# Altium PCB PCB.PcbDoc (part 1 of 2)
Units mm, origin at the board's own origin, x right, y up, seen from the top; angles counter-clockwise.
Board outline 168.8 x 66.7 mm, 2 copper layers (Top Layer, Bottom Layer); 76 components, 58 nets, 255 pads, 137 vias.
Unrouted connection lines stored in the file: 16.
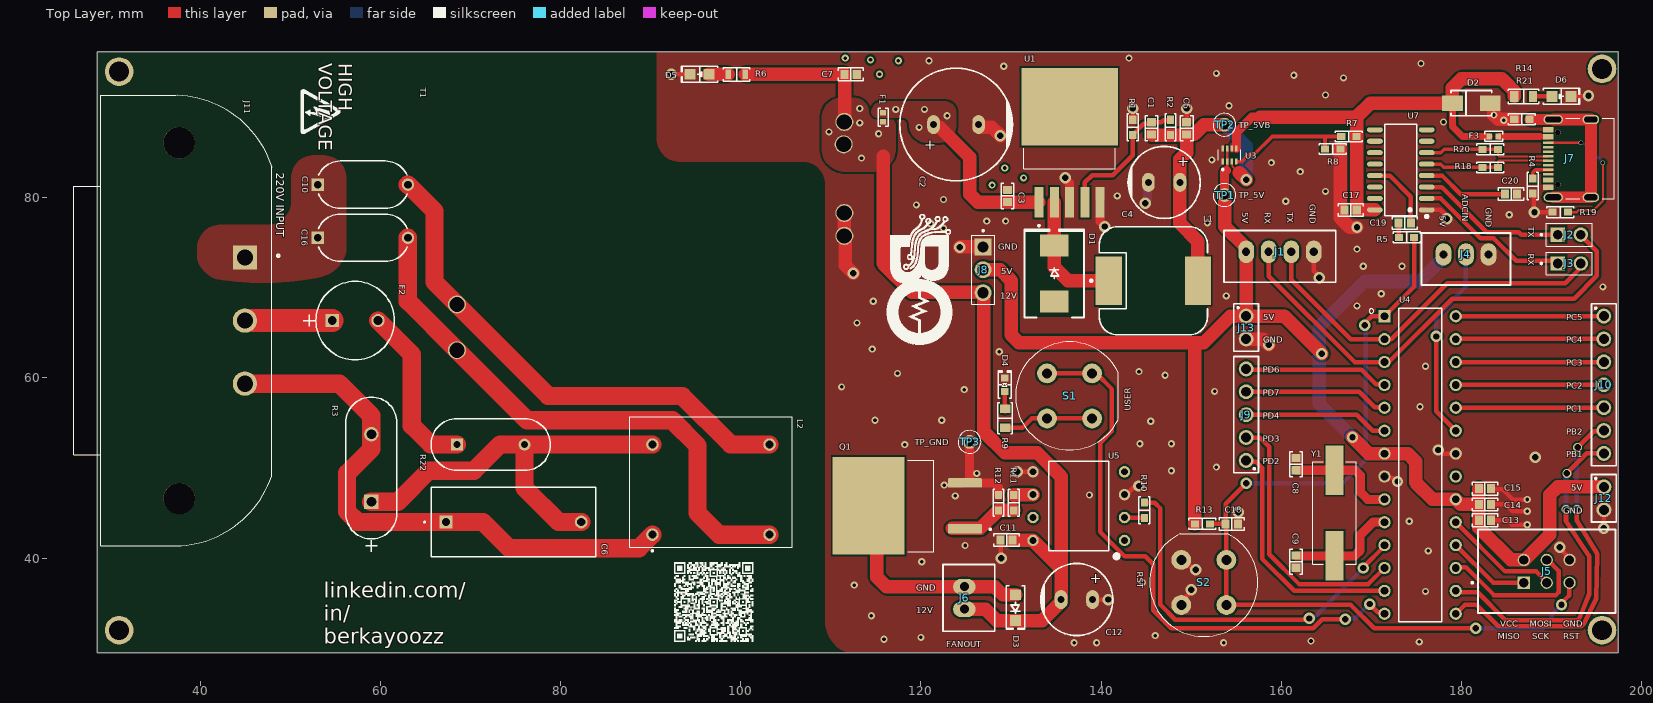
[diagram p0: Top Layer view]
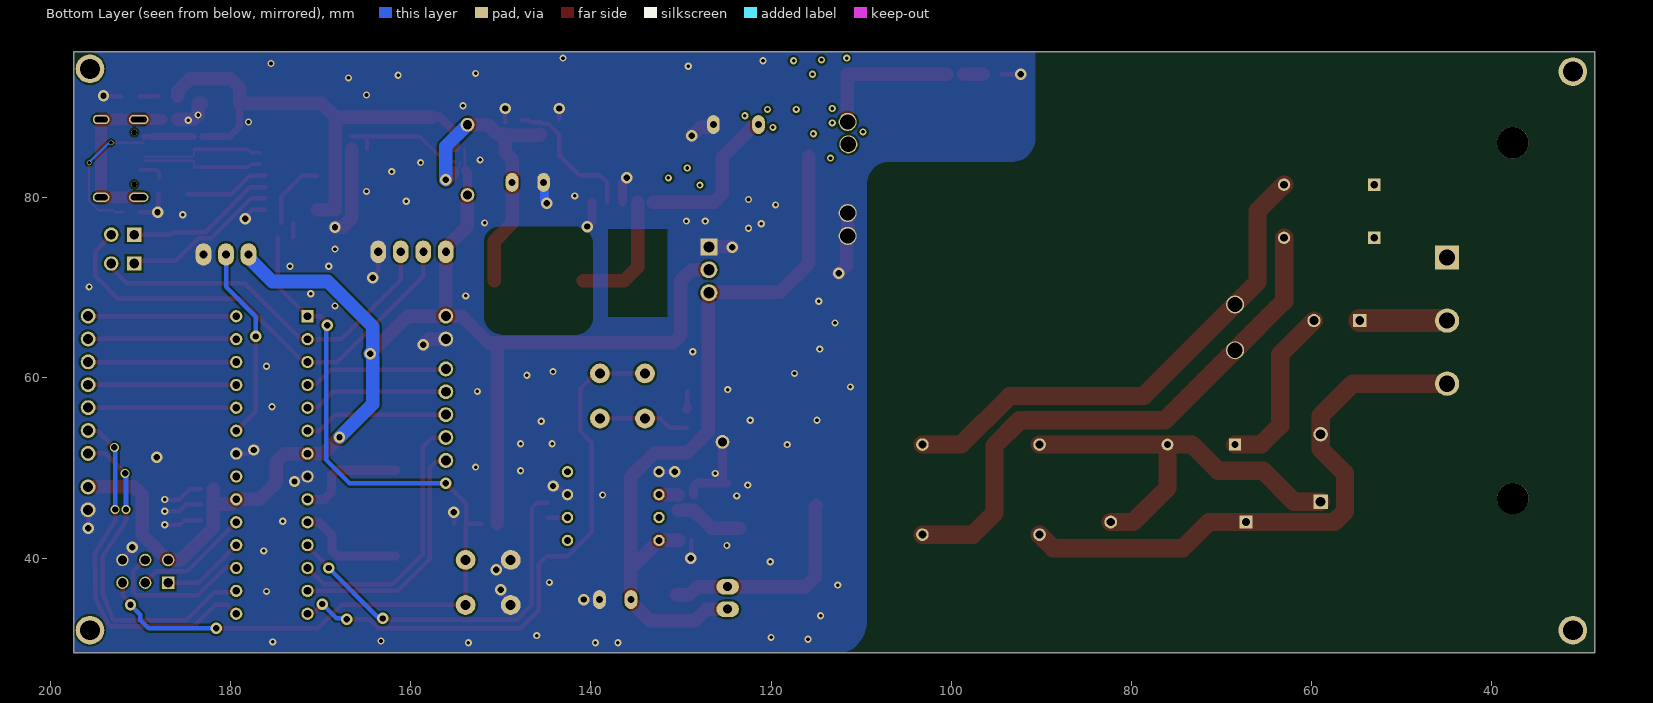
[diagram p1: Bottom Layer view, seen from below]

## Layer stack, top to bottom
Top Solder: solder mask 0.0102, Solder Resist, Dk 3.5
Top Layer: signal copper 0.0356
Dielectric 1: dielectric 0.32, FR-4, Dk 4.8
Bottom Layer: signal copper 0.0356
Bottom Solder: solder mask 0.0102, Solder Resist, Dk 3.5

## Board outline
28.6,29.5 28.6,96.2 197.4,96.2 197.4,29.5

## Design rules (kind name [scope] priority, off if disabled: settings)
Clearance [All] p1: gap=0.229 ignorepadtopadclearanceinfootprint=TRUE except(0.127: Arc-SMDPad Arc-Text Arc-Hole Track-SMDPad Track-Text Track-Hole SMDPad-SMDPad SMDPad-THPad SMDPad-Via SMDPad-Text SMDPad-Hole THPad-THPad THPad-Via THPad-Text THPad-Hole Via-Via Via-Text Via-Hole Fill-Text Poly-Text Region-Text Text-Text Text-Hole; 0.178: SMDPad-Fill SMDPad-Poly SMDPad-Region; 0.2: Arc-Arc Arc-Track Arc-Via Track-Track Track-Via; 0.28: Arc-THPad Track-THPad)
Creepage [All] p1: checkdistance=0.254
DiffPairsRouting [All] p1: maxlimit=0.254 minlimit=0.254 mostfreqgap=0.254 toplayer_minwidth=0.16 toplayer_maxwidth=0.381 toplayer_prefwidth=0.381 bottomlayer_minwidth=0.16 bottomlayer_maxwidth=0.381 bottomlayer_prefwidth=0.381 maxuncoupledlength=12.7
Height [All] p1: minheight=0 maxheight=1500 prefheight=12.7
PasteMaskExpansion [All] p1: expansion=0.127
PolygonConnect [All] p1: connectstyle=Direct reliefconductorwidth=0.254 reliefentries=4 polygonreliefangle="90 Angle" airgapwidth=0.254
RoutingVias [All] p1: holewidth=0.711 width=1.27 viastyle="Through Hole" minholewidth=0.4 minwidth=0.5 maxholewidth=0.711 maxwidth=1.27
SolderMaskExpansion SolderMaskExpansion_1 [All] p1: expansion=0.102 istentingtop=FALSE
SolderMaskExpansion SolderMaskExpansion_Via [IsVia] p2: expansion=0.102 istentingtop=TRUE
Width [All] p1: maxlimit=2.54 minlimit=0.16 preferedwidth=1.5 minimp=50.000000 maximp=50.000000 favimp=50.000000
27 further rules are at their usual default settings.

## Classes and differential pairs
component class "Power Schematic": C1 C2 C3 C4 C5 C6 C7 C10 C16 D1 D5 D6 F1 F2 J8 J11 L1 L2 R1 R2 R3 R6 R7 R8 R14 R22 T1 TP1 TP2 TP3 TP_5V TP_BUCK TP_GND U1 U3
component class "Microcontroller Schematic": C8 C9 C11 C12 C13 C14 C15 C17 C18 C19 C20 D2 D3 D4 F3 J1 J2 J3 J4 J5 J6 J7 J9 J10 J12 J13 Q1 R4 R5 R9 R10 R11 R12 R13 R18 R19 R20 R21 S1 S2 U4 U5 U7 Y1
differential pair D: +D_P -D_N

## Components (designator, comment, footprint, x,y, rotation, side; value= is the part's Value field where it differs from the comment)
C1 "10000 pF" "CAP 0603_1608" 145.6,87.7 r270 top
C2 "470µF" "CAP TH ALUM ELEC D12.50mm S5.00mm H27.00mm" 123.9,88.125 r180 top
C3 "0.1 µF" "CAP 0603_1608" 129.6,80.2 r270 top
C4 "220µF" "CAP TH ALUM ELEC D8.00mm S3.50mm H16.50mm" 147,81.7 r0 top
C5 "0.1 µF" "CAP 0603_1608" 149.5,87.7 r270 top
C6 "R46KI322040M2K" CAP_R46KI322040M2K_KEM 67.3,44 r0 top
C7 "0.1 µF" "CAP 0603_1608" 112.2,93.7 r180 top
C8 "20pF" "CAP 0603_1608" 161.65,50.421 r90 top
C9 "20pF" "CAP 0603_1608" 161.65,39.6 r270 top
C10 "G10E1E222MN0B0S0N0" G10E1E222MN0B0S0N0 58.057,81.45 r0 top
C11 "0.1 µF" "CAP 0603_1608" 129.5,42 r0 top
C12 "100 µF" "CAP TH ALUM ELEC D8.00mm S3.50mm H16.50mm" 137.3,35.4 r0 top
C13 "0.1 µF" "CAP 0603_1608" 182.6,44.2 r180 top
C14 "0.1 µF" "CAP 0603_1608" 182.6,45.95 r180 top
C15 "4.7 µF" "CAP 0603_1608" 182.6,47.7 r180 top
C16 "G10E1E222MN0B0S0N0" G10E1E222MN0B0S0N0 58.057,75.55 r0 top
C17 "0.1 µF" "CAP 0603_1608" 167.7,78.648 r180 top
C18 "0.1 µF" "CAP 0603_1608" 154.5,43.8 r0 top
C19 "0.1 µF" "CAP 0603_1608" 173.7,77.2 r0 top
C20 "0.1 µF" "CAP 0603_1608" 185.5,80.4 r180 top
D1 "MBRS540T3G" "DO214AB SMC" 134.8,71.6 r90 top
D2 "400W, 5VDC" WE-TVSP_DO-214AC_Unidirectional 181.1,90.5 r0 top
D3 "1N4007FLTR" SOD123F 130.5,34.5 r270 top
D4 "Green" "LED 0603_1608 GREEN" 129.3,59.25 r90 top
D5 "Blue" "LED 0805_2012 BLUE" 95.425,93.7 r180 top
D6 "Blue" "LED 0805_2012 BLUE" 191.1,91.25 r0 top
F1 "SF-1206S300-2" "FUSE 0402_1005 0.51MM" 115.8,88.91 r90 top
F2 "MRT 3.15AMMO" MRT_BEL 57.2,66.362 r0 top
F3 "SF-1206S300-2" "FUSE 0402_1005 0.51MM" 183.6,86.8 r180 top
J1 "B4B-XH-A(LF)(SN)" "JST XH B4B-XH-A" 159.85,74 r0 top
J2 "M20-9990246" HARWIN_M20-9990246 191.97,75.9 r0 top
J3 "M20-9990246" HARWIN_M20-9990246 191.97,72.7 r0 top
J4 "B3B-XH-A(LF)(SN)" "JST XH B3B-XH-A" 180.5,73.7 r0 top
J5 "TST-103-01-L-D" SAMTEC_TST-103-01-L-D 186.92,37.26 r0 top
J6 "B2B-XH-A(LF)(SN)" "JST XH B2B-XH-A" 124.818,35.575 r90 top
J7 "10155435-00011LF" AMPHENOL_10155435-00011LF 194.363,84.363 r90 top
J8 "61300311121" WURTH_61300311121 126.9,72 r270 top
J9 "6130XX11121_61300511121" 61300511121 156.1,55.92 r90 top
J10 "6130XX11121_61300711121" 61300711121 195.8,59.24 r270 top
J11 "703W-00/52" QUALTEK_703W-00/52 44.967,73.362 r270 top
J12 "6130XX11121_61300211121" 61300211121 195.81,46.63 r270 top
J13 "6130XX11121_61300211121" 61300211121 156.1,65.59 r270 top
L1 "68 µH" "WURTH WE-PD 1210" 145.8,70.8 r0 top
L2 "SSRH7H-M04596" SSRH7HM04596 90.2,42.6 r0 top value=59.6mH
Q1 "IRFZ44NSTRLPBF" DPAK254P1524X483-3N 118.49,45.8 r180 top
R1 "1 kOhms" "YAGEO RES 0603_1608" 143.5,87.8 r270 top
R2 "3.01 kOhms" "YAGEO RES 0603_1608" 147.7,87.8 r270 top
R3 "14D471K" VARS_B72214S_15p5x5p4-7p5_TDK 59,50 r90 top value=516pF
R4 "5.1 kOhms" "YAGEO RES 0603_1608" 187.9,81.3 r90 top
R5 "0 Ohms" "YAGEO RES 0603_1608" 173.9,75.6 r0 top
R6 "620 Ohms" "YAGEO RES RK73 RS73 SG73 0805_2012" 99.55,93.7 r180 top
R7 "10 kOhms" "YAGEO RES 0603_1608" 167.5,86.8 r0 top
R8 "10 kOhms" "YAGEO RES 0603_1608" 165.7,85.4 r180 top
R9 "220 Ohms" "YAGEO RES 0805_2012" 129.354,55.522 r90 top
R10 "200 Ohms" "YAGEO RES 0603_1608" 144.8,45.3 r270 top
R11 "10 Ohms" "YAGEO RES 0603_1608" 130.3,46.15 r270 top
R12 "10 kOhms" "YAGEO RES 0603_1608" 128.6,46.15 r270 top
R13 "10 kOhms" "YAGEO RES 0603_1608" 151.25,43.8 r180 top
R14 "220 Ohms" "YAGEO RES 0805_2012" 186.9,91.25 r0 top
R18 "10 Ohms" "YAGEO RES 0603_1608" 183.2,83.363 r180 top
R19 "5.1 kOhms" "YAGEO RES 0603_1608" 190.968,78.4 r0 top
R20 "10 Ohms" "YAGEO RES 0603_1608" 183.2,85.363 r180 top
R21 "1 MOhms" "YAGEO RES 0603_1608" 186.7,88.7 r180 top
R22 "MF72-010D11" MF72-010D11_CTM 72.25,52.6 r0 top
S1 "D6R90_F1_LFS" SW_D6R90_F1_LFS 136.5,58 r270 top
S2 "D6R90_F1_LFS" SW_D6R90_F1_LFS 151.4,37.3 r0 top
T1 "AP12N24" "POWER MODULE 49x36mm" 65.5,56.61 r0 top
TP1 "5115" KEYSTONE_5115 153.7,80.3 r0 top
TP2 "5115" KEYSTONE_5115 153.699,88.1 r180 top
TP3 "5115" KEYSTONE_5115 125.4,52.9 r0 top
U1 "LM2596S-ADJ/NOPB" LM2596 136.5,84.805 r90 top
U3 "TPS2116DRLR" SOTFL50P160X60-8N 154.25,84.735 r90 top
U4 "ATMEGA328P-PU" "DIP794W46P254L2967H457Q28B - duplicate" 175.41,50.33 r0 top
U5 "TLP250H(F)" DIP8_TOS 142.6,41.96 r180 top
U7 "CH340C" CH340C 173.2,83.1 r90 top
Y1 "ECS-160-20-5PX-TR" XTAL_ECS-160-20-5PX-TR 165.9,44.996 r90 top

## Footprints (in the part's own frame and the unit in brackets; to place one, negate y for a bottom-side part, rotate by r counter-clockwise, add the part's x,y. Pads: shape width x height; smd on the part's side, far side on the other; paste and mask are expansions set on the pad)
61300211121 [mm]
  round 1.65 hole 1.1: 1(-1.27,0) 2(1.27,0)
  silkscreen extent -2.64,-1.37 2.64,1.37, body extent -2.54,-1.27 2.54,1.27, height 8.55
61300511121 [mm]
  round 1.65 hole 1.1: 1(-5.08,0) 2(-2.54,0) 3(0,0) 4(2.54,0) 5(5.08,0)
  silkscreen extent -6.45,-1.37 6.45,1.37, body extent -6.35,-1.27 6.35,1.27, height 8.55
61300711121 [mm]
  round 1.65 hole 1.1: 1(-7.62,0) 2(-5.08,0) 3(-2.54,0) 4(0,0) 5(2.54,0) 6(5.08,0) 7(7.62,0)
  silkscreen extent -8.99,-1.37 8.99,1.37, body extent -8.89,-1.27 8.89,1.27, height 8.55
AMPHENOL_10155435-00011LF [mm]
  rect 0.6x1.15 smd mask+0.05: A1_B12(-3.2,4.745) A4_B9(-2.4,4.745) B1_A12(3.2,4.745) B4_A9(2.4,4.745)
  rect 0.3x1.15 smd mask+0.05: A5(-1.25,4.745) A6(-0.25,4.745) A7(0.25,4.745) A8(1.25,4.745) B5(1.75,4.745) B6(0.75,4.745) B7(-0.75,4.745) B8(-1.75,4.745)
  oval 1.05x2.15 hole 0.65 slot 1.75 at 90 deg: SH1(-4.32,4.18) SH2(4.32,4.18)
  oval 1.05x1.85 hole 0.65 slot 1.45 at 90 deg: SH3(-4.32,0) SH4(4.32,0)
  round 0.65 hole 0.65 unplated: ""(-2.89,3.68) ""(2.89,3.68)
  silkscreen extent -4.47,-2.6 4.47,2.79, body extent -4.47,-2.6 4.47,5, height 3.26
"CAP 0603_1608" [mm] "Chip Capacitor, 2-Leads, Body 1.60x0.80mm, IPC Medium Density"
  rect 0.9x1 smd: 1(-0.675,0) 2(0.675,0)
  silkscreen extent -1.4,-0.7 1.4,0.7, body extent -0.8,-0.41 0.8,0.41, height 0.82
"CAP TH ALUM ELEC D8.00mm S3.50mm H16.50mm" [mm] "8mm Diameter 3.5mm Lead Spacing Aluminum Electrolytic Capacitors Radial, Can"
  oval 1.4x2.1 hole 0.8: 1(1.75,0) 2(-1.75,0)
  silkscreen extent -4,-4 4,4, body extent -4.01,-4 4,4, height 16.5
"CAP TH ALUM ELEC D12.50mm S5.00mm H27.00mm" [mm] "12.5mm Diameter 5mm Lead Spacing Aluminum Electrolytic Capacitors Radial, Can"
  oval 1.4x2.1 hole 0.8: 1(2.5,0) 2(-2.5,0)
  silkscreen extent -6.25,-6.25 6.25,6.25, body extent -6.26,-6.25 6.25,6.25, height 27
CAP_R46KI322040M2K_KEM [mil]
  rect 56x56 / inner round 60 / far side rect 56x56 hole 36 paste-28 mask+0: 1(0,0)
  round 56 / inner round 60 / far side round 56 hole 36 paste-28 mask+0: 2(590.55,0)
  silkscreen extent -97,-152 655,152, body extent -59,-147 650,147, height 515
CH340C [mm]
  oval 0.56x1.745 smd: 1(-4.452,-2.937) 2(-3.182,-2.937) 3(-1.912,-2.937) 4(-0.642,-2.937) 5(0.628,-2.937) 6(1.898,-2.937) 7(3.168,-2.937) 8(4.438,-2.937) 9(4.438,2.807) 10(3.168,2.807) 11(1.898,2.807) 12(0.628,2.807) 13(-0.642,2.807) 14(-1.912,2.807) 15(-3.182,2.807) 16(-4.452,2.807)
  silkscreen extent -5.33,-3.09 5.07,1.71, body extent -4.95,-3 4.95,3, height 1.75
DIP8_TOS [mil]
  round 50 / inner round 60 / far side round 50 hole 30 paste-25 mask+0: 1(0,0) 2(0,-100) 3(0,-200) 4(0,-300) 5(400,-300) 6(400,-200) 7(400,-100) 8(400,0)
  silkscreen extent 27,-345 331,77, body extent -5,-340 415,40, height 164
"DIP794W46P254L2967H457Q28B - duplicate" [mm]
  rect 1.358x1.358 hole 0.85: 1(-3.96,16.51)
  round 1.358 hole 0.85: 2(-3.96,13.97) 3(-3.96,11.43) 4(-3.96,8.89) 5(-3.96,6.35) 6(-3.96,3.81) 7(-3.96,1.27) 8(-3.96,-1.27) 9(-3.96,-3.81) 10(-3.96,-6.35) 11(-3.96,-8.89) 12(-3.96,-11.43) 13(-3.96,-13.97) 14(-3.96,-16.51) 15(3.96,-16.51) 16(3.96,-13.97) 17(3.96,-11.43) 18(3.96,-8.89) 19(3.96,-6.35) 20(3.96,-3.81) 21(3.96,-1.27) 22(3.96,1.27) 23(3.96,3.81) 24(3.96,6.35) 25(3.96,8.89) 26(3.96,11.43) 27(3.96,13.97) 28(3.96,16.51)
  silkscreen extent -5.65,-17.4 2.38,17.4, body extent -3.95,-17.34 3.95,17.34, height 4.09
"DO214AB SMC" [mm] "Molded Diode, 2-Leads, Body 6.85x5.90mm, IPC Medium Density"
  rect 2.45x3.15 smd: 1(-3.1,0) 2(3.1,0)
  silkscreen extent -4.9,-3.3 4.9,3.3, body extent -3.97,-2.95 3.97,2.95, height 2.6
DPAK254P1524X483-3N [mm]
  rrect25% 3.78x1.06 smd: 1(-6.4,2.54) 3(-6.4,-2.54)
  rect 8x10.84 smd paste-6: 2(4.29,0)
  silkscreen extent -9.3,-5.08 -0.05,5.08, body extent -7.62,-5.08 7.62,5.08, height 4.83
"FUSE 0402_1005 0.51MM" [mm]
  rect 0.6x0.7 smd: 1(-0.5,0) 2(0.5,0)
  silkscreen extent -1,-0.55 1,0.55, body extent -0.5,-0.25 0.5,0.26, height 0.61
G10E1E222MN0B0S0N0 [mil]
  rect 54x54 / inner round 60 / far side rect 54x54 hole 34 paste-27 mask+0: 1(-196.85,0)
  round 54 / inner round 60 / far side round 54 hole 34 paste-27 mask+0: 2(196.85,0)
  silkscreen extent -194,-104 194,104, body extent -210,-97 210,100, height 547
HARWIN_M20-9990246 [mm]
  rect 1.605x1.605 / inner round 1.605 / far side rect 1.605x1.605 hole 1.07: 1(-1.27,0)
  round 1.605 hole 1.07: 2(1.27,0)
  silkscreen extent -3.2,-1.27 2.54,1.27, body extent -2.54,-1.27 2.54,1.27, height 8.74
"JST XH B2B-XH-A" [mm]
  oval 1.75x2.5 hole 1: 1(-1.25,0) 2(1.25,0)
  silkscreen extent -3.7,-3.38 3.7,2.38, body extent -3.7,-3.38 3.7,2.38, height 7
"JST XH B3B-XH-A" [mm]
  oval 1.75x2.5 hole 0.9: 1(-2.5,0) 2(0,0) 3(2.5,0)
  silkscreen extent -4.95,-3.38 4.95,2.38, body extent -4.95,-3.38 4.95,2.38, height 7
"JST XH B4B-XH-A" [mm]
  oval 1.75x2.5 hole 0.9: 1(-3.75,0) 2(-1.25,0) 3(1.25,0) 4(3.75,0)
  silkscreen extent -6.2,-3.38 6.2,2.38, body extent -6.2,-3.38 6.2,2.38, height 7
KEYSTONE_5115 [mm]
  round 1.53 hole 1.02: TP(0,0)
  silkscreen extent -1.27,-1.27 1.27,1.27, body extent -1.33,-1.25 1.21,1.29, height 3.18
"LED 0603_1608 GREEN" [mm] "Chip Diode, 2-Leads, Body 1.60x0.80mm, IPC Medium Density"
  rect 0.8x0.8 smd: 1(-0.75,0) 2(0.75,0)
  silkscreen extent -1.52,-0.7 1.52,0.7, body extent -0.8,-0.4 0.8,0.4, height 0.53
"LED 0805_2012 BLUE" [mm] "Chip Diode, 2-Leads, Body 2.00x1.25mm, IPC Medium Density"
  rect 1.2x1.2 smd: 1(-1.05,0) 2(1.05,0)
  silkscreen extent -2.03,-0.9 2.03,0.9, body extent -1,-0.62 1,0.63, height 0.9
LM2596 [mm]
  rect 3.4x1 smd paste-0.05 mask+0.07: 1(-5.3,3.4) 2(-5.3,1.7) 3(-5.3,0) 4(-5.3,-1.7) 5(-5.3,-3.4)
  rect 8.6x10.7 smd paste-0.05 mask+0.07: 6(5.3,0)
  silkscreen extent -8,-5.08 0.68,5.08, body extent -5.18,-5.08 9.17,5.08, height 4.65
MF72-010D11_CTM [mil]
  rect 52x52 / inner round 60 / far side rect 52x52 hole 32 paste-26 mask+0: 1(-147.64,0)
  round 52 / inner round 60 / far side round 52 hole 32 paste-26 mask+0: 2(147.64,0)
  silkscreen extent -261,-113 261,113, body extent -256,-118 256,118, height 806
MRT_BEL [mil]
  rect 58x58 / inner round 60 / far side rect 58x58 hole 38 paste-29 mask+0: 1(-100,0)
  round 58 / inner round 60 / far side round 58 hole 38 paste-29 mask+0: 2(100,0)
  silkscreen extent -226,-172 172,172, body extent -167,-166 166,166, height 312
"POWER MODULE 49x36mm" [mm]
  round 2 hole 1.7 mask+0.05: 1(3,6.46) 2(3,11.54) 3(46,31.8) 4(45.923,29.315) 5(46,21.69) 6(46,19.15)
  body extent 0,0 49,36, height 22.5
QUALTEK_703W-00/52 [mm]
  rect 2.7x2.7 hole 1.8: 1(0,0)
  round 2.7 hole 1.8: 2(7,0) 3(14,0)
  round 3.5 hole 3.5 unplated: ""(-12.75,-7.3) ""(26.75,-7.3)
  silkscreen extent -18,-19 32,3.85, body extent -17.94,-19.18 32.16,8.62, height 27.12
SAMTEC_TST-103-01-L-D [mm]
  rect 1.37x1.37 hole 1.02: 01(0,0)
  round 1.37 hole 1.02: 02(0,2.54) 03(2.54,0) 04(2.54,2.54) 05(5.08,0) 06(5.08,2.54)
  silkscreen extent -5.83,-3.36 10.16,5.9, body extent -5.1,-3.23 10.14,6.04, height 8.89
SOD123F [mm] "SODFL, 2-Leads, Body 1.60x3.50mm, IPC Medium Density"
  rect 1.2x1.2 smd: 1(-1.43,0) 2(1.43,0)
  silkscreen extent -2.41,-1.02 2.41,1.02, body extent -1.75,-0.8 1.75,0.8, height 1.1
SOTFL50P160X60-8N [mm]
  rrect25% 0.66x0.32 smd: 1(-0.735,0.75) 2(-0.735,0.25) 3(-0.735,-0.25) 4(-0.735,-0.75) 5(0.735,-0.75) 6(0.735,-0.25) 7(0.735,0.25) 8(0.735,0.75)
  silkscreen extent -1.7,-1.23 0.6,1.23, body extent -0.8,-1.05 0.8,1.05, height 0.6
SSRH7HM04596 [mm]
  round 1.4 hole 0.9: 1(0,0) 2(13,0) 3(13,10) 4(0,10)
  silkscreen extent -2.5,-1.9 15.5,13.1, body extent -2.54,-2.3 15.46,12.2, height 10.98
SW_D6R90_F1_LFS [mm]
  round 2.2 hole 1.1: 1(-2.5,2.5) 2(-2.5,-2.5) 3(2.5,-2.5) 4(2.5,2.5)
  silkscreen extent -6,-6 6,5.4, body extent -6,-5.92 6,5.48, height 14.3
VARS_B72214S_15p5x5p4-7p5_TDK [mil]
  rect 63x63 / inner round 60 / far side rect 63x63 hole 43 paste-31.5 mask+0: 1(-147.64,0)
  round 63 / inner round 60 / far side round 63 hole 43 paste-31.5 mask+0: 2(147.64,0)
  silkscreen extent -365,-112 310,112, body extent -322,-182 322,182, height 755
WE-TVSP_DO-214AC_Unidirectional [mm] "Power TVS Diode, 2-Leads. body 4.24x2.67mm"
  rect 2.3x1.7 smd: 1(-2.1,0) 2(2.1,0)
  silkscreen extent -2.25,-1.4 2.25,1.4, body extent -2.56,-1.33 2.56,1.34, height 2.24
"WURTH WE-PD 1210" [mm] "SMT Shielded Power Inductor, 2-leads, body 12x12mm"
  rect 2.9x5.4 smd: 1(-4.95,-0.016) 2(4.95,-0.016)
  silkscreen extent -7.02,-6.02 6,5.98, body extent -6,-6.02 6,5.98, height 9.46
WURTH_61300311121 [mm]
  rect 1.875x1.875 / inner round 1.875 / far side rect 1.875x1.875 hole 1.25: 1(-2.54,0)
  round 1.875 hole 1.25: 2(0,0) 3(2.54,0)
  silkscreen extent -4.45,-1.27 3.81,1.27, body extent -3.81,-1.27 3.81,1.27, height 7.27
XTAL_ECS-160-20-5PX-TR [mm]
  rect 5.5x2 smd: 1(-4.75,0) 2(4.75,0)
  silkscreen extent -5.7,-2.4 5.7,2.4, body extent -6.6,-2.4 6.6,2.4, height 3.2
"YAGEO RES 0603_1608" [mm] "Chip Resistor, 2-Leads, Body 1.60x0.80mm"
  rect 0.9x0.8 smd: 1(-0.85,0) 2(0.85,0)
  silkscreen extent -1.5,-0.6 1.5,0.6, body extent -0.8,-0.4 0.8,0.4, height 0.45
"YAGEO RES 0805_2012" [mm] "Chip Resistor, 2-Leads, Body 2.00x1.25mm"
  rect 0.9x1.2 smd: 1(-1.05,0) 2(1.05,0)
  silkscreen extent -1.7,-0.8 1.7,0.8, body extent -1,-0.62 1,0.63, height 0.6
"YAGEO RES RK73 RS73 SG73 0805_2012" [mm] "Chip Resistor, 2-Leads, Body 2.00x1.25mm"
  rect 0.6x1.05 smd: 1(-0.95,0) 2(0.95,0)
  silkscreen extent -1.48,-0.75 1.48,0.75, body extent -1,-0.62 1,0.63, height 0.6

## Part data
C1: library part KAF15AR71H103KT, "CAP CER 10000PF 50V X7R 0603", Device Package="0603 (1608 Metric)", manufacturer="KYOCERA AVX", Operating Temperature="-55°C ~ 125°C", Ratings=AEC-Q200, Supplier Part Number 1=478-KAF15AR71H103KTCT-ND, Temperature Coefficient=X7R, Tolerance=±10%, Voltage - Rated=50V, Applications="Automotive, Boardflex Sensitive", Capacitance="10000 pF", componentlink1description=Datasheet, componentlink1url=https://datasheets.kyocera-avx.com/AutoMLCC.pdf, componentlink2description="DigiKey Link", componentlink2url=https://www.digikey.com/en/products/detail/kyocera-avx/KAF15AR71H103KT/3660860, Features="Soft Termination", lastupdated="9.02.2024 20:09:12", Lifecycle Status=Active, Minimum Order=1, Mounting Type="Surface Mount, MLCC", Package / Case="0603 (1608 Metric)", packaging=TapeAndReel, Part Number=KAF15AR71H103KT, Part Status=Active, partid=52545, price=0.03, series=FLEXITERM®, Size / Dimension="0.063\" L x 0.032\" W (1.60mm x 0.81mm)", Supplier 1=DigiKey, Thickness (Max)="0.035\" (0.90mm)"
C2: library part EEU-FC1H471B, "CAP ALUM 470UF 20% 50V RADIAL", Device Package="Radial, Can", Lifetime @ Temp.="5000 Hrs @ 105°C", manufacturer="Panasonic Electronic Components", Operating Temperature="-55°C ~ 105°C", Ratings=AEC-Q200, Ripple Current @ High Frequency="1.832A @ 100kHz", Ripple Current @ Low Frequency="1.374A @ 120Hz", Supplier Part Number 1=P19660CT-ND, Tolerance=±20%, Voltage - Rated=50V, Applications=Automotive, Capacitance=470µF, componentlink1description=Datasheet, componentlink1url=http://industrial.panasonic.com/www-cgi/jvcr13pz.cgi?E+PZ+3+ABA0022+EEUFC1H471B+7+WW, componentlink2description="DigiKey Link", componentlink2url=http://digikey.com/product-detail/en/panasonic-electronic-components/EEU-FC1H471B/P19660CT-ND/6109558, Height - Seated (Max)="1.063\" (27.00mm)", lastupdated="2.09.2020 01:32:14", Lead Spacing="0.197\" (5.00mm)", Lifecycle Status=Active, Minimum Order=1, Mounting Type="Through Hole", Package / Case="Radial, Can", packaging=TapeAndBox, Part Number=EEU-FC1H471B, Part Status=Active, partid=15215, Polarization=Polar, price=0.43, series=FC, Size / Dimension="0.492\" Dia (12.50mm)", Supplier 1=DigiKey, Impedance="50 mOhms"
C3 C5 C11 C13 C14 C17 C18 C19 C20: library part C0603X104M3RAC7867, "CAP CER 0.1UF 25V X7R 0603", Device Package="0603 (1608 Metric)", manufacturer=KEMET, Operating Temperature="-55°C ~ 125°C", Supplier Part Number 1=399-13148-1-ND, Temperature Coefficient=X7R, Tolerance=±20%, Voltage - Rated=25V, Applications="Boardflex Sensitive", Capacitance="0.1 µF", componentlink1description=Datasheet, componentlink1url=https://api.kemet.com/component-edge/download/datasheet/C0603X104M3RACTU.pdf, componentlink2description="DigiKey Link", componentlink2url=https://www.digikey.com/en/products/detail/kemet/C0603X104M3RAC7867/2202613, Features="Soft Termination", lastupdated="9.02.2024 20:10:30", Lifecycle Status=Active, Minimum Order=1, Mounting Type="Surface Mount, MLCC", Package / Case="0603 (1608 Metric)", packaging=TapeAndReel, Part Number=C0603X104M3RAC7867, Part Status=Active, partid=2484, price=0.06, series="SMD Comm X7R Flex", Size / Dimension="0.063\" L x 0.031\" W (1.60mm x 0.80mm)", Supplier 1=DigiKey, Thickness (Max)="0.034\" (0.87mm)"
C4: library part EEU-FM1V221L, "CAP ALUM 220UF 20% 35V RADIAL", Device Package="Radial, Can", Lifetime @ Temp.="3000 Hrs @ 105°C", manufacturer="Panasonic Electronic Components", Operating Temperature="-40°C ~ 105°C", Ripple Current @ High Frequency="1.24A @ 100kHz", Ripple Current @ Low Frequency="868mA @ 120Hz", Supplier Part Number 1=P12412-ND, Tolerance=±20%, Voltage - Rated=35V, Applications="General Purpose", Capacitance=220µF, componentlink1description=Datasheet, componentlink1url=http://industrial.panasonic.com/www-cgi/jvcr13pz.cgi?E+PZ+3+ABA0108+EEUFM1V221L+7+WW, componentlink2description="DigiKey Link", componentlink2url=http://digikey.com/product-detail/en/panasonic-electronic-components/EEU-FM1V221L/P12412-ND/613773, Height - Seated (Max)="0.650\" (16.50mm)", lastupdated="8.09.2020 02:47:34", Lead Spacing="0.138\" (3.50mm)", Lifecycle Status=Active, Minimum Order=1, Mounting Type="Through Hole", Package / Case="Radial, Can", packaging=Bulk, Part Number=EEU-FM1V221L, Part Status=Active, partid=24542, Polarization=Polar, price=0.45, series=FM, Size / Dimension="0.315\" Dia (8.00mm)", Supplier 1=DigiKey, Impedance="41 mOhms"
C6: "R46_275, Film, Metallized Polypropylene, Safety, 0.22 uF, 10%, 275 VAC (X2), 560 VDC, 110Ã‚Â°C, Lead Spacing = 15mm", Capacitance=0.2uF, Manufacturer_Name=Kemet, Copyright="Copyright (C) 2025 Ultra Librarian. All rights reserved.", Datasheet=https://content.kemet.com/datasheets/KEM_F3093_R46_X2_275_110C.pdf, Digi-Key_Part_Number_1=399-17016-ND, Manufacturer_Part_Number=R46KI322040M2K, Type="Film Capacitor"
C7: library part C0603C104K5RAC7411, "CAP CER 0.1UF 50V X7R 0603", Device Package="0603 (1608 Metric)", manufacturer=KEMET, Operating Temperature="-55°C ~ 125°C", Supplier Part Number 1=399-C0603C104K5RAC7411CT-ND, Temperature Coefficient=X7R, Tolerance=±10%, Voltage - Rated=50V, Applications="Bypass, Decoupling", Capacitance="0.1 µF", componentlink1description=Datasheet, componentlink1url=https://api.kemet.com/component-edge/download/datasheet/C0603C104K5RAC7411.pdf, componentlink2description="DigiKey Link", componentlink2url=https://www.digikey.com/en/products/detail/kemet/C0603C104K5RAC7411/3317013, lastupdated="9.02.2024 20:10:30", Lifecycle Status=Active, Minimum Order=1, Mounting Type="Surface Mount, MLCC", Package / Case="0603 (1608 Metric)", packaging=TapeAndReel, Part Number=C0603C104K5RAC7411, Part Status=Active, partid=2233, price=0.01, series="SMD Comm X7R", Size / Dimension="0.063\" L x 0.031\" W (1.60mm x 0.80mm)", Supplier 1=DigiKey, Thickness (Max)="0.035\" (0.90mm)"
C8 C9: library part 06033A200JAT2A, "CAP CER 20PF 25V C0G/NP0 0603", Device Package="0603 (1608 Metric)", manufacturer="AVX Corporation", Operating Temperature="-55°C ~ 125°C", Supplier Part Number 1=478-11802-1-ND, Temperature Coefficient="C0G, NP0", Tolerance=±5%, Voltage - Rated=25V, Applications="General Purpose", Capacitance=20pF, componentlink1description=Datasheet, componentlink1url=http://datasheets.avx.com/C0GNP0-Dielectric.pdf, componentlink2description="DigiKey Link", componentlink2url=http://digikey.com/product-detail/en/avx-corporation/06033A200JAT2A/478-11802-1-ND/8573438, lastupdated="2.09.2020 01:03:34", Lifecycle Status=Active, Minimum Order=1, Mounting Type="Surface Mount, MLCC", Package / Case="0603 (1608 Metric)", packaging=TapeAndReel, Part Number=06033A200JAT2A, Part Status=Active, partid=3067, price=0.04, series=-, Size / Dimension="0.063\" L x 0.032\" W (1.60mm x 0.81mm)", Supplier 1=DigiKey, Thickness (Max)="0.035\" (0.90mm)"
C10 C16: "2200 pF ±20% 250V Ceramic Capacitor Y5U (E) Radial, Disc", Capacitance="2200 pF", Ratings="X1, Y2", Tolerance=±20%, Voltage - Rated=250V, componentlink1description=Digikey, componentlink1url=https://www.digikey.com/en/products/detail/songtian-electronic-technology-hk-limited/G10E1E222MN0B0S0N0/13985619
C12: library part EEU-TA1E101, "CAP ALUM 100UF 20% 25V RADIAL", Device Package="Radial, Can", Lifetime @ Temp.="2000 Hrs @ 125°C", manufacturer="Panasonic Electronic Components", Operating Temperature="-40°C ~ 125°C", Ripple Current @ High Frequency="500 mA @ 100 kHz", Ripple Current @ Low Frequency="325 mA @ 120 Hz", Supplier Part Number 1=P19501-ND, Tolerance=±20%, Voltage - Rated="25 V", Applications="General Purpose", Capacitance="100 µF", componentlink1description=Datasheet, componentlink1url=http://industrial.panasonic.com/www-cgi/jvcr13pz.cgi?E+PZ+3+ABA0028+EEUTA1E101+8+WW, componentlink2description="DigiKey Link", componentlink2url=https://www.digikey.com/en/products/detail/panasonic-electronic-components/EEU-TA1E101/2689893, Height - Seated (Max)="0.492\" (12.50mm)", lastupdated="3.06.2024 20:06:12", Lead Spacing="0.138\" (3.50mm)", Lifecycle Status=Active, Minimum Order=1, Mounting Type="Through Hole", Package / Case="Radial, Can", packaging=Bulk, Part Number=EEU-TA1E101, Part Status=Active, partid=7202, Polarization=Polar, price=0.25, series=TA, Size / Dimension="0.315\" Dia (8.00mm)", Supplier 1=DigiKey, Impedance="130 mOhms"
C15: library part CL10A475KA8NQNC, "CAP CER 4.7UF 25V X5R 0603", Device Package="0603 (1608 Metric)", manufacturer="Samsung Electro-Mechanics", Operating Temperature="-55°C ~ 85°C", Supplier Part Number 1=1276-1900-1-ND, Temperature Coefficient=X5R, Tolerance=±10%, Voltage - Rated=25V, Applications="General Purpose", Capacitance="4.7 µF", componentlink1description=Datasheet, componentlink1url=http://www.samsungsem.com/kr/support/product-search/mlcc/CL10A475KA8NQNC.jsp, componentlink2description="DigiKey Link", componentlink2url=https://www.digikey.com/en/products/detail/samsung-electro-mechanics/CL10A475KA8NQNC/3887558, lastupdated="9.02.2024 20:10:30", Lifecycle Status=Active, Minimum Order=1, Mounting Type="Surface Mount, MLCC", Package / Case="0603 (1608 Metric)", packaging=TapeAndReel, Part Number=CL10A475KA8NQNC, Part Status=Active, partid=2349, price=0.06, series=CL, Size / Dimension="0.063\" L x 0.031\" W (1.60mm x 0.80mm)", Supplier 1=DigiKey, Thickness (Max)="0.035\" (0.90mm)"
D1: "DIODE SCHOTTKY 40V 5A SMC", Current - Average Rectified (Io)=5A, Current - Reverse Leakage @ Vr="300µA @ 40V", manufacturer="ON Semiconductor", Operating Temperature - Junction="-65°C ~ 150°C", Package / Case="DO-214AB, SMC", Supplier Device Package=SMC, Supplier Part Number 1=MBRS540T3GOSCT-ND, Voltage - DC Reverse (Vr) (Max)=40V, Voltage - Forward (Vf) (Max) @ If="500mV @ 5A", componentlink1description=Datasheet, componentlink1url=http://www.onsemi.com/pub/Collateral/MBRS540T3-D.PDF, componentlink2description="DigiKey Link", componentlink2url=http://digikey.com/product-detail/en/on-semiconductor/MBRS540T3G/MBRS540T3GOSCT-ND/918011, Diode Type=Schottky, lastupdated="3.06.2024 19:54:13", Lifecycle Status=Active, Minimum Order=1, Mounting Type="Surface Mount", packaging=TapeAndReel, Part Number=MBRS540T3G, Part Status=Active, partid=1713, price=0.17, series=-, Speed="Fast Recovery =< 500ns, > 200mA (Io)", Supplier 1=DigiKey
D2: library part 824500500, "WE-TVSP SMT Power TVS Diode, DO-214AC, Unidirectional, 400W, 5VDC", (Reverse) Breakdown Voltage=6.7V, (Reverse) Peak Pulse Current=43.5A, Case/Size Code=DO-214AC, Clamping Voltage=9.2V, manufacturer="Wurth Elektronik", Operating Temperature Max=150°C, Operating Temperature Min=-65°C, Operating Voltage (DC)=5V, Power Dissipation=400W, Category="Surge Protection", componentlink1description="Website Link", componentlink1url=https://www.we-online.com/redexpert/article/824500500?ad, componentlink2description="Datasheet Link", componentlink2url=https://www.we-online.com/redexpert/spec/824500500?ad, Height=2.25mm, Length=4.24mm, Manufacturer Part Number=824500500, Match Code=WE-TVSP, Mount="Surface Mount", packaging="Tape and Reel", Polarity=Unidirectional, Width=2.67mm
D3: "STANDARD RECTIFIER 1000V SOD-123", Capacitance @ Vr, F="15pF @ 4V, 1MHz", Current - Average Rectified (Io)=1A, Current - Reverse Leakage @ Vr="5µA @ 1000V", manufacturer="SMC Diode Solutions", Package / Case=SOD-123F, Supplier Device Package=SOD-123FL, Supplier Part Number 1=1655-1N4007FLCT-ND, Voltage - DC Reverse (Vr) (Max)=1000V, Voltage - Forward (Vf) (Max) @ If="1.1V @ 1A", componentlink1description=Datasheet, componentlink1url=http://www.smc-diodes.com/propdf/1N4001FL-1N4007FL%20N1646%20REV.A.pdf, componentlink2description="DigiKey Link", componentlink2url=http://digikey.com/product-detail/en/smc-diode-solutions/1N4007FLTR/1655-1N4007FLCT-ND/11657827, Diode Type=Standard, lastupdated="30.08.2020 20:59:55", Lifecycle Status=Active, Minimum Order=1, Mounting Type="Surface Mount", packaging=TapeAndReel, Part Number=1N4007FLTR, partid=3314, price=0.01, Speed="Standard Recovery >500ns, > 200mA (Io)", Supplier 1=DigiKey
D4: library part "LT Q99G.01-R2T1-25-1", "NEXT GENERATION OF CHIP LED 0603", Current - Test=5mA, Device Package="0603 (1608 Metric)", Lens Color=Colorless, manufacturer="ams-OSRAM USA Inc.", Millicandela Rating=247.5mcd, Supplier Device Package=0603, Supplier Part Number 1=475-LTQ99G.01-R2T1-25-1CT-ND, Voltage - Forward (Vf) (Typ)=2.9V, Color=Green, componentlink2description="DigiKey Link", componentlink2url=https://www.digikey.com/en/products/detail/ams-osram-usa-inc/LT-Q99G-01-R2T1-25-1/21556499, Height (Max)=0.75mm, lastupdated="3.06.2024 19:58:39", Lens Size="1.10mm x 0.80mm", Lens Style="Rectangle with Flat Top", Lens Transparency=Clear, Lifecycle Status=Active, Minimum Order=1, Mounting Type="Surface Mount", Package / Case="0603 (1608 Metric)", packaging=TapeAndReel, Part Number="LT Q99G.01-R2T1-25-1", partid=1419, price=0.03, series="Chip LED 0603", Size / Dimension="1.60mm L x 0.80mm W", Supplier 1=DigiKey, Viewing Angle=140°, Wavelength - Dominant=530nm, Wavelength - Peak=518nm
D5 D6: library part APT2012VBC/D, "LED BLUE CLR CHIP SMD", Current - Test=20mA, Device Package="0805 (2012 Metric)", Lens Color=Colorless, manufacturer=Kingbright, Millicandela Rating=180mcd, Supplier Device Package="Chip LED", Supplier Part Number 1=754-1794-1-ND, Voltage - Forward (Vf) (Typ)=3.3V, Color=Blue, componentlink1description=Datasheet, componentlink1url=http://www.kingbrightusa.com/images/catalog/SPEC/APT2012VBC-D.pdf, componentlink2description="DigiKey Link", componentlink2url=https://www.digikey.com/en/products/detail/kingbright/APT2012VBC-D/4098483, Configuration=Standard, Height (Max)=0.75mm, lastupdated="3.06.2024 19:58:02", Lens Size="1.30mm x 1.25mm", Lens Style="Rectangle with Flat Top", Lens Transparency=Clear, Lifecycle Status=Active, Minimum Order=1, Mounting Type="Surface Mount", Package / Case="0805 (2012 Metric)", packaging=TapeAndReel, Part Number=APT2012VBC/D, Part Status=Active, partid=755, price=0.13, series=-, Size / Dimension="2.00mm L x 1.25mm W", Supplier 1=DigiKey, Viewing Angle=120°, Wavelength - Dominant=470nm, Wavelength - Peak=465nm
F1 F3: "FUSE BOARD MOUNT 3A 32VDC 1206", Part Number=SF-1206S300-2
F2: "FUSE", Manufacturer_Name=Belfuse, componentlink1description=Link, componentlink1url=https://www.digikey.com/en/products/detail/bel-fuse-inc/MRT-3-15-AMMO/615070, Copyright="Copyright (C) 2025 Ultra Librarian. All rights reserved.", Digi-Key_Part_Number_1=507-1116-3-ND, Manufacturer_Part_Number="MRT 3.15AMMO"
J1: "CONN HEADER VERT 4POS 2.5MM", Current Rating (Amps)=3A, manufacturer="JST Sales America Inc.", Material Flammability Rating="UL94 V-0", Operating Temperature="-25°C ~ 85°C", Supplier Part Number 1=455-2249-ND, Voltage Rating=250V, Insulation Color=Natural, componentlink1description=Datasheet, componentlink1url=http://www.jst-mfg.com/product/pdf/eng/eXH.pdf, componentlink2description="DigiKey Link", componentlink2url=http://digikey.com/product-detail/en/jst-sales-america-inc/B4B-XH-A-LF-SN/455-2249-ND/1651047, Connector Type=Header, Contact Finish - Mating=Tin, Contact Finish - Post=Tin, Contact Length - Post="0.134\" (3.40mm)", Contact Material=Brass, Contact Shape=Square, Contact Type="Male Pin", Fastening Type="Detent Lock", lastupdated="12.01.2020 23:46:34", Lifecycle Status=Active, Minimum Order=1, Mounting Type="Through Hole", Number of Positions=4, Number of Positions Loaded=All, Number of Rows=1, packaging=Bulk, Part Number=B4B-XH-A(LF)(SN), Part Status=Active, partid=69, Pitch - Mating="0.098\" (2.50mm)", price=0.21, series=XH, Shrouding="Shrouded - 4 Wall", Style="Board to Cable/Wire", Supplier 1=DigiKey, Termination="Press-Fit, Solder", Insulation Height="0.276\" (7.00mm)", Insulation Material="Polyamide (PA66), Nylon 6/6"
J2 J3: "2.54mm (0.1) Pitch SIL Vertical Throughboard Pin Header, 6.1mm mating pin height, tin, 2 contacts", Package=None, Check_prices=https://www.snapeda.com/parts/M20-9990246/Harwin/view-part/?ref=eda, MF=Harwin, MP=M20-9990246, SnapEDA_Link=https://www.snapeda.com/parts/M20-9990246/Harwin/view-part/?ref=snap
J4: "CONN HEADER VERT 3POS 2.5MM", Current Rating (Amps)=3A, manufacturer="JST Sales America Inc.", Material Flammability Rating="UL94 V-0", Operating Temperature="-25°C ~ 85°C", Supplier Part Number 1=455-2248-ND, Voltage Rating=250V, Insulation Color=Natural, componentlink1description=Datasheet, componentlink1url=http://www.jst-mfg.com/product/pdf/eng/eXH.pdf, componentlink2description="DigiKey Link", componentlink2url=http://digikey.com/product-detail/en/jst-sales-america-inc/B3B-XH-A-LF-SN/455-2248-ND/1651046, Connector Type=Header, Contact Finish - Mating=Tin, Contact Finish - Post=Tin, Contact Length - Post="0.134\" (3.40mm)", Contact Material=Brass, Contact Shape=Square, Contact Type="Male Pin", Fastening Type="Detent Lock", lastupdated="12.01.2020 23:46:22", Lifecycle Status=Active, Minimum Order=1, Mounting Type="Through Hole", Number of Positions=3, Number of Positions Loaded=All, Number of Rows=1, packaging=Bulk, Part Number=B3B-XH-A(LF)(SN), Part Status=Active, partid=68, Pitch - Mating="0.098\" (2.50mm)", price=0.19, series=XH, Shrouding="Shrouded - 4 Wall", Style="Board to Cable/Wire", Supplier 1=DigiKey, Termination="Press-Fit, Solder", Insulation Height="0.276\" (7.00mm)", Insulation Material="Polyamide (PA66), Nylon 6/6"
J5: "Connector Header Through Hole 6 position 0.100 _2.54mm_", Package=None, Availability=Unavailable, MF=Samtec, MP=TST-103-01-L-D, price=None, SnapEDA_Link=https://www.snapeda.com/parts/TST-103-01-L-D/Samtec/view-part/3264916/?ref=snap, Toby_UK-Purchase-URL=https://snapeda.com/shop?store=Toby+UK&id=3264916
J6: "CONN HEADER VERT 2POS 2.5MM", Current Rating (Amps)=3A, manufacturer="JST Sales America Inc.", Material Flammability Rating="UL94 V-0", Operating Temperature="-25°C ~ 85°C", Supplier Part Number 1=455-2247-ND, Voltage Rating=250V, Insulation Color=Natural, componentlink1description=Datasheet, componentlink1url=http://www.jst-mfg.com/product/pdf/eng/eXH.pdf, componentlink2description="DigiKey Link", componentlink2url=http://digikey.com/product-detail/en/jst-sales-america-inc/B2B-XH-A-LF-SN/455-2247-ND/1651045, Connector Type=Header, Contact Finish - Mating=Tin, Contact Finish - Post=Tin, Contact Length - Post="0.134\" (3.40mm)", Contact Material=Brass, Contact Shape=Square, Contact Type="Male Pin", Fastening Type="Detent Lock", lastupdated="12.01.2020 23:46:08", Lifecycle Status=Active, Minimum Order=1, Mounting Type="Through Hole", Number of Positions=2, Number of Positions Loaded=All, Number of Rows=1, packaging=Bulk, Part Number=B2B-XH-A(LF)(SN), Part Status=Active, partid=67, Pitch - Mating="0.098\" (2.50mm)", price=0.15, series=XH, Shrouding="Shrouded - 4 Wall", Style="Board to Cable/Wire", Supplier 1=DigiKey, Termination="Press-Fit, Solder", Insulation Height="0.276\" (7.00mm)", Insulation Material="Polyamide (PA66), Nylon 6/6"
J7: "USB-C (USB TYPE-C) Receptacle Connector 24 (16+8 Dummy) Position Surface Mount, Right Angle", manufacturer="AMPHENOL ICC (FCI)", Package=None, Supplier Part Number 1=04AJ5525, Availability=Unavailable, Manufacturer Part Number=10155435-00011LF, MP=10155435-00011LF, price=None, RoHS=No, Supplier 1=Newark
J8 J9 J10 J12 J13: Package=None, Availability=Unavailable, price=None
  J8: MP=61300311121
  J9: MF="{'manufacturer': u'W\xfcrth Elektronik'}", MP=61300511121
  J10: MF="{'manufacturer': u'Wurth Electronics'}", MP=61300711121
  J12 J13: MF="{'manufacturer': u'Wurth Electronics'}", MP=61300211121
J11: "Mains Power Connector, 15A, 250VAC, Female, Solder Terminal, Receptacle", Color=Black, Current=15A, manufacturer=Qualtek, Max Voltage Rating (AC)=250V, Package=None, Supplier Part Number 1=562-703W-00/52, Approvals="CSA, DEMKO, FIMKO, KEMA, NEMKO, SEMKO, UL, VDE", Availability=Unavailable, Category="Power Connectors", componentlink1description=https://datasheet.octopart.com:443/703W-00/52-Qualtek-datasheet-12512752.pdf?src-supplier=IHS, componentlink1url=https://datasheet.octopart.com:443/703W-00/52-Qualtek-datasheet-12512752.pdf?src-supplier=IHS, componentlink2description=https://datasheet.octopart.com:443/703W-00/52-Qualtek-datasheet-156925.pdf?src-supplier=Sager+Electronics, componentlink2url=https://datasheet.octopart.com:443/703W-00/52-Qualtek-datasheet-156925.pdf?src-supplier=Sager+Electronics, ComponentLink3Description=https://datasheet.octopart.com:443/703W-00/52-Qualtek-datasheet-45059.pdf?src-supplier=RS+(Formerly+Allied+Electronics), ComponentLink3URL=https://datasheet.octopart.com:443/703W-00/52-Qualtek-datasheet-45059.pdf?src-supplier=RS+(Formerly+Allied+Electronics), ComponentLink4Description=https://datasheet.octopart.com:443/703W-00/52-Qualtek-datasheet-138486.pdf?src-supplier=DigiKey, ComponentLink4URL=https://datasheet.octopart.com:443/703W-00/52-Qualtek-datasheet-138486.pdf?src-supplier=DigiKey, Connector Type="Pin, Receptacle", Contact Gender=Female, Contact Material=Tin, Contact Plating=Tin, Current Rating=15A, Fuse=No, Gender=Receptacle, Height=27.8mm, Housing Material=Thermoplastic, Lead Free="Lead Free", Lifecycle Status=Production, Manufacturer Part Number=703W-00/52, Max Current Rating=15A, MF=Qualtek, Mounting Technology="Flanges, PCB, Panel, Through Hole", MP=703W-00/52, Number of Contacts=3, Number of Poles=2, Number of Positions=3, Orientation="Right Angle", Panel Thickness=3.048mm, Pins=3, Pitch=7mm, price=None, Pricing 1="1=1,54, 10=1,31, 50=1,17, 100=1,08, 1000=0,926, 10000=0,882 (USD)", REACH SVHC=Yes, RoHS=Compliant, Schedule B="8536695050, 8536695050|8536695050|8536695050|8536695050|8536695050", SnapEDA_Link=https://www.snapeda.com/parts/703W-00/52/Qualtek/view-part/46399/?ref=snap, Stock 1=1479, Supplier 1=Mouser, Termination=Solder, Voltage Rating=250V, Voltage Rating (AC)=250V, Voltage Rating (DC)=250V
L1: library part 7447709680, "FIXED IND 68UH 3.2A 89 MOHM SMD", Current - Saturation=3.6A, Current Rating (Amps)="3.2 A", DC Resistance (DCR)="89mOhm Max", Device Package=Nonstandard, Frequency - Self Resonant=5.5MHz, manufacturer="Würth Elektronik", Operating Temperature="-40°C ~ 125°C", Ratings=AEC-Q200, Supplier Device Package=1212, Supplier Part Number 1=732-1247-1-ND, Tolerance=±20%, Inductance Frequency - Test="1 kHz", componentlink1description=Datasheet, componentlink1url=https://katalog.we-online.de/pbs/datasheet/7447709680.pdf, componentlink2description="DigiKey Link", componentlink2url=https://www.digikey.com/en/products/detail/würth-elektronik/7447709680/1638652, Height - Seated (Max)="0.394\" (10.00mm)", lastupdated="3.06.2024 20:26:17", Lifecycle Status=Active, Material - Core=Ferrite, Minimum Order=1, Mounting Type="Surface Mount", Package / Case=Nonstandard, packaging=TapeAndReel, Part Number=7447709680, Part Status=Active, partid=5691, price=1.48, series=WE-PD, Shielding=Shielded, Size / Dimension="0.472\" L x 0.472\" W (12.00mm x 12.00mm)", Supplier 1=DigiKey, Type="Drum Core, Wirewound", Inductance="68 µH"
L2: "Common Mode Chokes Dual 59600uH 10kHz 0.4A 2.02Ohm DCR Thru-Hole Tray", Current Rating=400mA, manufacturer=KEMET, Max Operating Temperature=120°C, Min Operating Temperature=-25°C, Mouser Part Number=80-SSRH7H-M04596, Voltage Rating=250V, Insulation Resistance=100MΩ, Approvals=UL, Category="Common Mode Chokes", componentlink1description=https://datasheet.octopart.com:443/SSRH7H-M04596-KEMET-datasheet-180505042.pdf?src-supplier=TME, componentlink1url=https://datasheet.octopart.com:443/SSRH7H-M04596-KEMET-datasheet-180505042.pdf?src-supplier=TME, componentlink2description=https://datasheet.octopart.com:443/SSRH7H-M04596-KEMET-datasheet-181844466.pdf?src-supplier=TME, componentlink2url=https://datasheet.octopart.com:443/SSRH7H-M04596-KEMET-datasheet-181844466.pdf?src-supplier=TME, ComponentLink3Description=https://datasheet.octopart.com:443/SSRH7H-M04596-KEMET-datasheet-119327233.pdf?src-supplier=TME, ComponentLink3URL=https://datasheet.octopart.com:443/SSRH7H-M04596-KEMET-datasheet-119327233.pdf?src-supplier=TME, ComponentLink4Description=https://datasheet.octopart.com:443/SSRH7H-M04596-KEMET-datasheet-118607337.pdf?src-supplier=TME, ComponentLink4URL=https://datasheet.octopart.com:443/SSRH7H-M04596-KEMET-datasheet-118607337.pdf?src-supplier=TME, ComponentLink5Description=https://datasheet.octopart.com:443/SSRH7H-M04596-KEMET-datasheet-141259685.pdf?src-supplier=Newark, ComponentLink5URL=https://datasheet.octopart.com:443/SSRH7H-M04596-KEMET-datasheet-141259685.pdf?src-supplier=Newark, ComponentLink6Description=https://datasheet.octopart.com:443/SSRH7H-M04596-KEMET-datasheet-182797630.pdf?src-supplier=Master+Electronics, ComponentLink6URL=https://datasheet.octopart.com:443/SSRH7H-M04596-KEMET-datasheet-182797630.pdf?src-supplier=Master+Electronics, Datasheet Link=https://content.kemet.com/datasheets/KEM_LF0040_SSRH7H-M.pdf, Geometry.Height=12mm, Height=12mm, Length=18mm, Lifecycle Status=Production, Manufacturer Part Number=SSRH7H-M04596, Manufacturer_Name=KEMET, Manufacturer_Part_Number=SSRH7H-M04596, Mouser Price/Stock=https://www.mouser.co.uk/ProductDetail/KEMET/SSRH7H-M04596?qs=r5DSvlrkXmJdXW%2FbuXmveA%3D%3D, Pricing 1="100=0,6846, 300=0,678, 500=0,677, 1000=0,664, 5000=0,655 (USD)", REACH SVHC=Yes, RoHS=Compliant, Stock 1=22200, Supplier 1="Arrow Electronics", Supplier Part Number 1=SSRH7H-M04596, Width=14.5mm
Q1: "RoHS Compliant", Package="D2PAK Infineon", Check_prices=https://www.snapeda.com/parts/IRFZ44NSTRLPBF/Infineon+Technologies/view-part/?ref=eda, MF="Infineon Technologies", MP=IRFZ44NSTRLPBF, SnapEDA_Link=https://www.snapeda.com/parts/IRFZ44NSTRLPBF/Infineon+Technologies/view-part/?ref=snap
R1: library part RT0603BRD071KL, "RES SMD 1K OHM 0.1% 1/10W 0603", Device Package="0603 (1608 Metric)", manufacturer=Yageo, Operating Temperature="-55°C ~ 155°C", Power (Watts)="0.1W, 1/10W", Supplier Device Package=0603, Supplier Part Number 1=YAG1237CT-ND, Temperature Coefficient=±25ppm/°C, Tolerance=±0.1%, componentlink1description=Datasheet, componentlink1url=https://www.yageo.com/upload/media/product/productsearch/datasheet/rchip/PYu-RT_1-to-0.01_RoHS_L_11.pdf, componentlink2description="DigiKey Link", componentlink2url=https://www.digikey.com/en/products/detail/yageo/RT0603BRD071KL/1072344, Composition="Thin Film", Height - Seated (Max)="0.022\" (0.55mm)", lastupdated="25.07.2024 09:19:32", Lifecycle Status=Active, Minimum Order=1, Number of Terminations=2, Package / Case="0603 (1608 Metric)", packaging=TapeAndReel, Part Number=RT0603BRD071KL, Part Status=Active, partid=5625, price=0.03, Resistance="1 kOhms", series=RT, Size / Dimension="0.063\" L x 0.031\" W (1.60mm x 0.80mm)", Supplier 1=DigiKey
R2: library part ERJ-3EKF3011V, "RES SMD 3.01K OHM 1% 1/10W 0603", Device Package="0603 (1608 Metric)", manufacturer="Panasonic Electronic Components", Operating Temperature="-55°C ~ 155°C", Power (Watts)="0.1W, 1/10W", Ratings=AEC-Q200, Supplier Device Package=0603, Supplier Part Number 1=P3.01KHCT-ND, Temperature Coefficient=±100ppm/°C, Tolerance=±1%, componentlink1description=Datasheet, componentlink1url=https://industrial.panasonic.com/cdbs/www-data/pdf/RDA0000/AOA0000C304.pdf, componentlink2description="DigiKey Link", componentlink2url=https://www.digikey.com/en/products/detail/panasonic-electronic-components/ERJ-3EKF3011V/196267, Composition="Thick Film", Features="Automotive AEC-Q200", Height - Seated (Max)="0.022\" (0.55mm)", lastupdated="9.02.2024 20:43:34", Lifecycle Status=Active, Minimum Order=1, Number of Terminations=2, Package / Case="0603 (1608 Metric)", packaging=TapeAndReel, Part Number=ERJ-3EKF3011V, Part Status=Active, partid=5650, price=0.01, Resistance="3.01 kOhms", series=ERJ-3EK, Size / Dimension="0.063\" L x 0.031\" W (1.60mm x 0.80mm)", Supplier 1=DigiKey
R3: "Metal oxide varistor, radial, VV 470 V, 4500 A, 385 V (DC), 300 V (AC), ±10 %, 125 J", Case/Package=Radial, Clamping Current=50A, Clamping Voltage=775V, manufacturer=Bourns, Manufacturer Part Number=MOV-14D471K, Max Operating Temperature=105°C, Max Surge Current=4.5kA, Max Varistor Voltage=517V, Max Voltage Rating (AC)=300V, Max Voltage Rating (DC)=385V, Min Operating Temperature=-40°C, Min Varistor Voltage=423V, Power Dissipation=600mW, Supplier Part Number 1=3373349, Tolerance=10%, Category=Varistors, China RoHS=Compliant, componentlink1description=https://datasheet.octopart.com:443/MOV-14D471K-Bourns-datasheet-182141936.pdf?src-supplier=IHS, componentlink1url=https://datasheet.octopart.com:443/MOV-14D471K-Bourns-datasheet-182141936.pdf?src-supplier=IHS, componentlink2description=https://datasheet.octopart.com:443/MOV-14D471K-Bourns-datasheet-17269412.pdf?src-supplier=Farnell, componentlink2url=https://datasheet.octopart.com:443/MOV-14D471K-Bourns-datasheet-17269412.pdf?src-supplier=Farnell, ComponentLink3Description=https://datasheet.octopart.com:443/MOV-14D471K-Bourns-datasheet-154729739.pdf?src-supplier=Electro+Sonic, ComponentLink3URL=https://datasheet.octopart.com:443/MOV-14D471K-Bourns-datasheet-154729739.pdf?src-supplier=Electro+Sonic, ComponentLink4Description=https://datasheet.octopart.com:443/MOV-14D471K-Bourns-datasheet-94104130.pdf?src-supplier=element14+APAC, ComponentLink4URL=https://datasheet.octopart.com:443/MOV-14D471K-Bourns-datasheet-94104130.pdf?src-supplier=element14+APAC, ComponentLink5Description=https://datasheet.octopart.com:443/MOV-14D471K-Bourns-datasheet-81453702.pdf?src-supplier=element14+APAC, ComponentLink5URL=https://datasheet.octopart.com:443/MOV-14D471K-Bourns-datasheet-81453702.pdf?src-supplier=element14+APAC, ComponentLink6Description=https://datasheet.octopart.com:443/MOV-14D471K-Bourns-datasheet-62136932.pdf?src-supplier=Newark, ComponentLink6URL=https://datasheet.octopart.com:443/MOV-14D471K-Bourns-datasheet-62136932.pdf?src-supplier=Newark, ComponentLink7Description=https://datasheet.octopart.com:443/MOV-14D471K-Bourns-datasheet-44494289.pdf?src-supplier=Newark, ComponentLink7URL=https://datasheet.octopart.com:443/MOV-14D471K-Bourns-datasheet-44494289.pdf?src-supplier=Newark, ComponentLink8Description=https://datasheet.octopart.com:443/MOV-14D471K-Bourns-datasheet-177040286.pdf?src-supplier=Burklin+Elektronik, ComponentLink8URL=https://datasheet.octopart.com:443/MOV-14D471K-Bourns-datasheet-177040286.pdf?src-supplier=Burklin+Elektronik, ComponentLink9Description=https://datasheet.octopart.com:443/MOV-14D471K-Bourns-datasheet-154729740.pdf?src-supplier=Burklin+Elektronik, ComponentLink9URL=https://datasheet.octopart.com:443/MOV-14D471K-Bourns-datasheet-154729740.pdf?src-supplier=Burklin+Elektronik, ComponentLink10Description=https://datasheet.octopart.com:443/MOV-14D471K-Bourns-datasheet-12546711.pdf?src-supplier=_legacy+Avnet, ComponentLink10URL=https://datasheet.octopart.com:443/MOV-14D471K-Bourns-datasheet-12546711.pdf?src-supplier=_legacy+Avnet, ComponentLink11Description=https://datasheet.octopart.com:443/MOV-14D471K-Bourns-datasheet-11048556.pdf?src-supplier=RS+(Formerly+Allied+Electronics), ComponentLink11URL=https://datasheet.octopart.com:443/MOV-14D471K-Bourns-datasheet-11048556.pdf?src-supplier=RS+(Formerly+Allied+Electronics), ComponentLink12Description=http://sigma.octopart.com:80/conflict_mineral_statement/Bourns-company-36.pdf?src-supplier=Compliance+Statements, ComponentLink12URL=http://sigma.octopart.com:80/conflict_mineral_statement/Bourns-company-36.pdf?src-supplier=Compliance+Statements, Contact Plating=Tin, Current Rating=50A, Depth=5.4mm, Diameter=14mm, Energy=125J, Height=20mm, Lead Pitch=7.5mm, Lead/Base Style=Radial, Lifecycle Status=Production, Mounting Technology="Radial, Through Hole", Number of Circuits=1, Number of Terminals=2, packaging=Bulk, Power Rating=600mW, Pricing 1="1=0,304, 10=0,192, 50=0,186, 100=0,169, 200=0,16, 600=0,146 (EUR)", Radiation Hardening=No, REACH SVHC=Yes, RoHS=Compliant, Schedule B="8533400080, 8533400080|8533400080|8533400080|8533400080|8533400080", Stock 1=1139, Supplier 1=Farnell, Thickness=5.4mm, Varistor Voltage=423V, Voltage Rating (AC)=300V, Voltage Rating (DC)=385V, Voltage Tolerance=10%, Weight=3.000003g, Width=5.4mm, Working Voltage=385V
R4 R19: library part RT0603FRE075K1L, "RES SMD 5.1K OHM 1% 1/10W 0603", Device Package="0603 (1608 Metric)", manufacturer=Yageo, Operating Temperature="-55°C ~ 155°C", Power (Watts)="0.1W, 1/10W", Supplier Device Package=0603, Supplier Part Number 1=YAG5966CT-ND, Temperature Coefficient=±50ppm/°C, Tolerance=±1%, componentlink1description=Datasheet, componentlink1url=https://www.yageo.com/upload/media/product/productsearch/datasheet/rchip/PYu-RT_1-to-0.01_RoHS_L_11.pdf, componentlink2description="DigiKey Link", componentlink2url=https://www.digikey.com/en/products/detail/yageo/RT0603FRE075K1L/1075435, Composition="Thin Film", Height - Seated (Max)="0.022\" (0.55mm)", lastupdated="25.07.2024 09:19:25", Lifecycle Status=Active, Minimum Order=1, Number of Terminations=2, Package / Case="0603 (1608 Metric)", packaging=TapeAndReel, Part Number=RT0603FRE075K1L, Part Status=Active, partid=16011, price=0.01, Resistance="5.1 kOhms", series=RT, Size / Dimension="0.063\" L x 0.031\" W (1.60mm x 0.80mm)", Supplier 1=DigiKey